# EAGLE board BSPD Test Board rev2 (EAGLE 7.7.0)
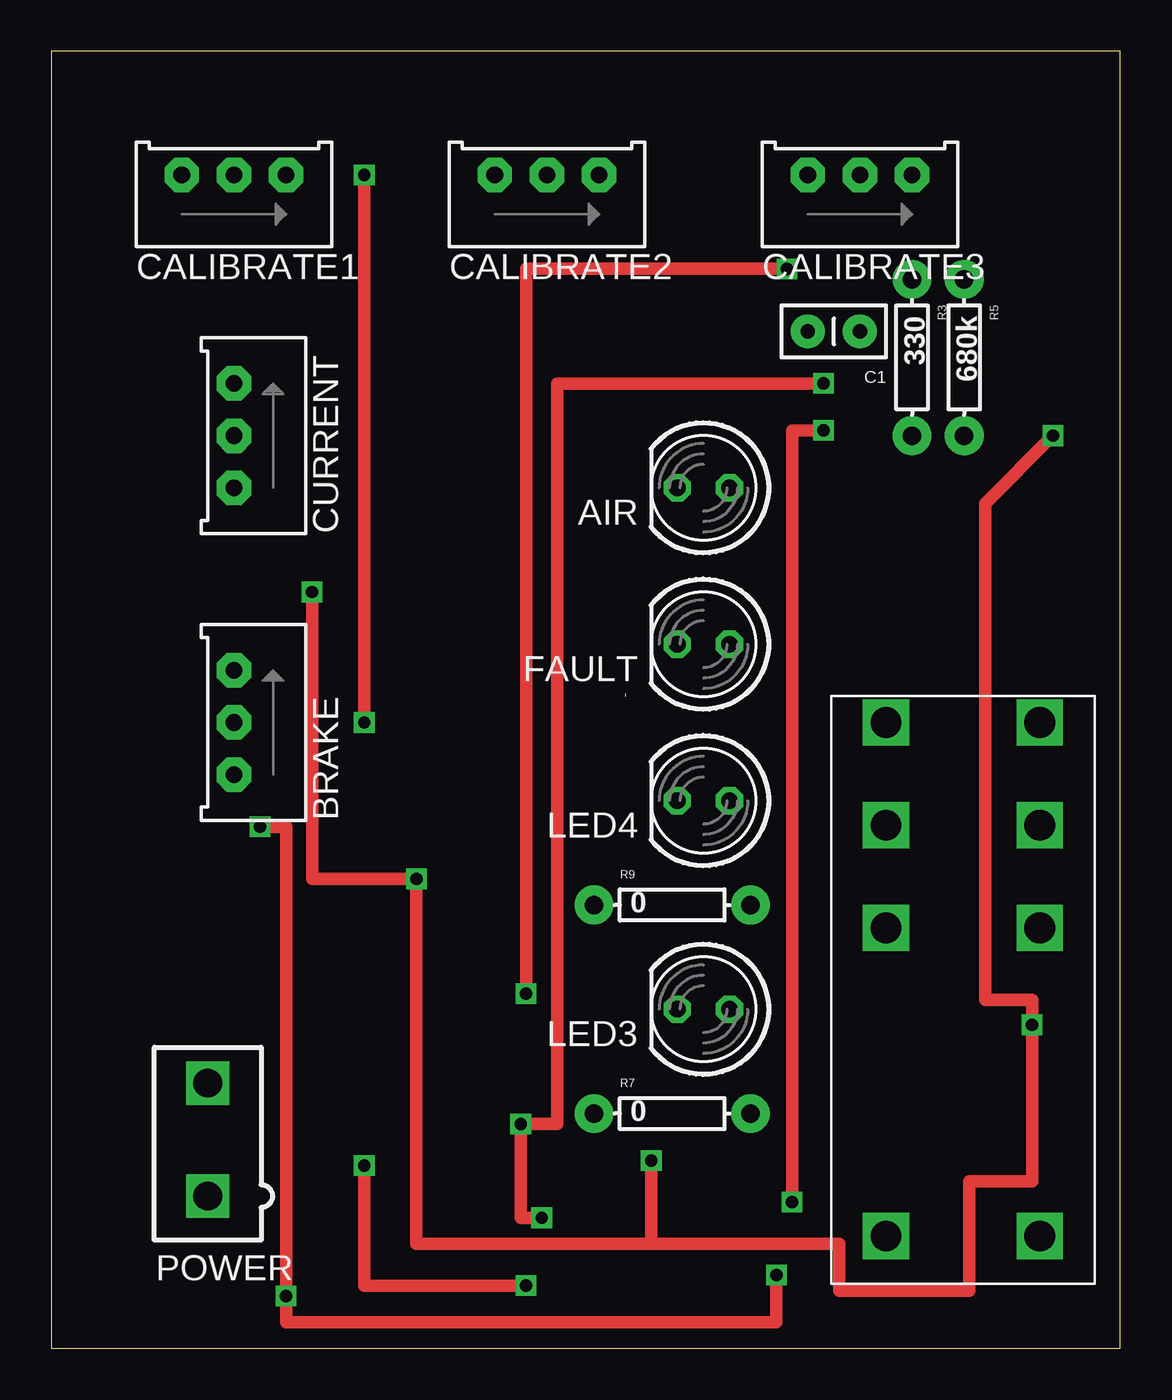
[diagram p0: board, top side]
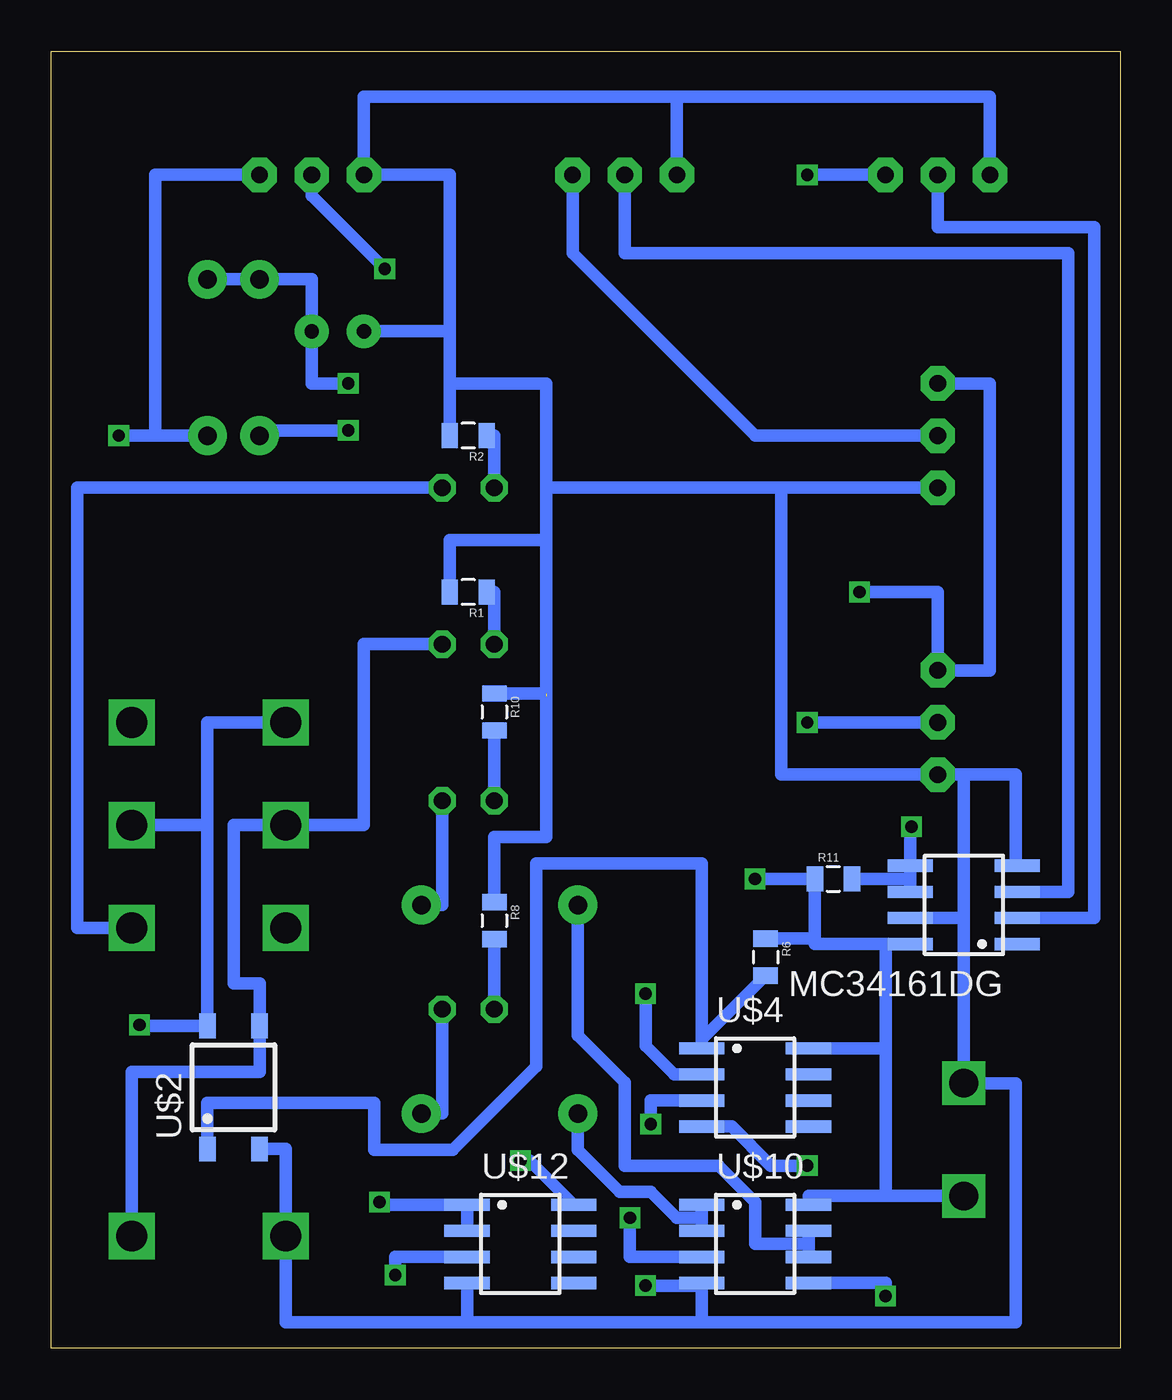
[diagram p1: board, bottom side, seen from below]

Size 52.05 x 63.17 mm. Coordinates in mm from the lower left corner, seen from the top.
Outline: 0,0 52.05,0 52.05,63.17 0,63.17 0,0
Copper layers (1*16): Top 0.035mm / dielectric 1.5mm / Bottom 0.035mm
Design rules "default": minimum track width 10mil, minimum drill 24mil, track to track 8mil, track to pad 8mil, pad to pad 8mil, via to via 8mil, smd to smd 8mil, copper to edge 40mil, drill to drill 8mil, minimum pad ring 10mil, minimum via ring 8mil, stop-mask expansion 4mil, vias tented up to drill 0mil, thermal gap 10mil

## Footprints (pad centres in the part's own frame; a part is rotated, then mirrored left to right if it is on the bottom)
LED-5MM = drill 0.813 octagon: A -1.27,0; K 1.27,0
TRIMPOT_3296 = drill 0.813 pad 1.676 octagon: 1 2.54,1.27; 2 0,1.27; 3 -2.54,1.27
CAP-PTH-SMALLEZ = drill 0.7 pad 1.651: 1 0,0; 2 2.54,0
SOIC-08 = smd 0.6 x 2.2: 1 -1.905,-2.6; 2 -0.635,-2.6; 3 0.635,-2.6; 4 1.905,-2.6; 5 1.905,2.6; 6 0.635,2.6; 7 -0.635,2.6; 8 -1.905,2.6
MINIFIT_5566-2 = drill 1.4 square: 1 0,-2.75; 2 0,2.75
0805 = smd 0.8 x 1.2: 1 -0.9,0; 2 0.9,0
AXIAL-0.3EZ = drill 0.9 pad 1.88: P$1 -3.81,0; P$2 3.81,0
SOP04 = smd 0.8 x 1.2: 1 -1.27,-3; 2 1.27,-3; 3 1.27,3; 4 -1.27,3
DPDT_RELAY_PANASONIC_JW2SN = drill 1.5 square: 2 10.008,0; 3 5.004,0; 4 0,0; 5 0,7.493; 6 5.004,7.493; 7 10.008,7.493; COIL+ 25.019,0; COIL- 25.019,7.493

## Placement (x,y rotation side)
AIR  [LED-5MM]  31.75,41.91 180 top
BRAKE  [TRIMPOT_3296]  10.16,30.48 90 top
C1  .47u  [CAP-PTH-SMALLEZ]  39.37,49.53 180 top
CALIBRATE1  [TRIMPOT_3296]  8.89,55.88 0 top
CALIBRATE2  [TRIMPOT_3296]  24.13,55.88 0 top
CALIBRATE3  [TRIMPOT_3296]  39.37,55.88 0 top
CURRENT  [TRIMPOT_3296]  10.16,44.45 90 top
FAULT  [LED-5MM]  31.75,34.29 180 top
LED3  [LED-5MM]  31.75,16.51 180 top
LED4  [LED-5MM]  31.75,26.67 180 top
MC34161DG  [SOIC-08]  7.62,21.59 90 bottom
POWER  MINIFIT_5566-2  [MINIFIT_5566-2]  7.62,10.16 0 top
R1  [0805]  31.75,36.83 180 bottom
R2  [0805]  31.75,44.45 180 bottom
R3  330  [AXIAL-0.3EZ]  41.91,48.26 270 top
R5  680k  [AXIAL-0.3EZ]  44.45,48.26 270 top
R6  680  [0805]  17.27,19.05 270 bottom
R7  0  [AXIAL-0.3EZ]  30.23,11.43 0 top
R8  [0805]  30.48,20.83 270 bottom
R9  0  [AXIAL-0.3EZ]  30.23,21.59 0 top
R10  [0805]  30.48,30.99 270 bottom
R11  10k  [0805]  13.97,22.86 0 bottom
U$2  CPC1002N  [SOP04]  43.18,12.7 0 bottom
U$3  DPDT_RELAY_PANASONIC_JW2SN-DC5V  [DPDT_RELAY_PANASONIC_JW2SN]  40.64,30.48 270 top
U$4  LM293DG4  [SOIC-08]  17.78,12.7 270 bottom
U$10  MCP6002  [SOIC-08]  17.78,5.08 270 bottom
U$12  MCP6002  [SOIC-08]  29.21,5.08 270 bottom

## Library data of the parts
AIR BRAKE C1 CALIBRATE1-CALIBRATE3 CURRENT FAULT LED3 LED4 MC34161DG R1-R3 R5-R11 U$2-U$4 U$10 U$12 = HyTechDevices
POWER = HyTechDevices; OC_FARNELL: 1822072; OC_NEWARK: unknown

## Nets
+5V: BRAKE.1 CALIBRATE3.1 CURRENT.1 MC34161DG.8 POWER.1 R5.P$2 R6.1 R11.1 U$2.4 U$3.4 U$3.6 U$4.8 U$10.8 U$12.8
GND: BRAKE.3 C1.2 CALIBRATE1.3 CALIBRATE2.3 CALIBRATE3.3 CURRENT.3 MC34161DG.4 MC34161DG.7 POWER.2 R1.2 R2.2 R8.1 R10.1 U$2.2 U$3.COIL+ U$4.4 U$10.4 U$12.4
N$1: FAULT.A U$2.3 U$3.3 U$3.COIL-
N$2: AIR.K R2.1
N$3: R3.P$2 U$12.1 U$12.2
N$4: MC34161DG.5 MC34161DG.6 R11.2 U$10.5 U$12.3
N$5: CALIBRATE2.2 MC34161DG.3
N$6: CALIBRATE1.2 MC34161DG.2
N$7: CALIBRATE3.2 U$4.2
N$8: FAULT.K R1.1
N$9: R6.2 U$2.1 U$4.1
N$10: LED3.A R7.P$2
N$11: LED3.K R8.2
N$12: LED4.A R9.P$2
N$13: C1.1 R3.P$1 R5.P$1 U$4.3 U$10.3
N$14: LED4.K R10.2
N$15: BRAKE.2 CALIBRATE1.1
READ_CHARGE: R7.P$1 U$10.1 U$10.2
READ_IMPED: R9.P$1 U$10.6 U$10.7
SENSE_A: CALIBRATE2.1 CURRENT.2
SHUTDOWN_OUT: AIR.A U$3.7

## Tracks (layer width: path | path; a pad name or v marks a point on that pad's centre or on a via)
+5V  (via drill 0.6)
  Top 0.61: v12.7,36.83 12.7,22.86 v17.78,22.86 17.78,5.08 29.21,5.08 | v48.77,44.45 45.47,41.15 45.47,16.97 47.75,16.97 v47.75,15.75 47.75,8.13 44.7,8.13 44.7,2.79 38.35,2.79 38.35,5.08 29.21,5.08 | v29.21,9.14 29.21,5.08
  Bottom 0.61: CURRENT.1 6.35,46.99 6.35,33.02 BRAKE.1 8.89,36.83 v12.7,36.83 | CALIBRATE3.1 46.99,57.15 46.99,44.45 R5.P$2 v48.77,44.45 | U$3.4 44.45,30.48 44.45,25.48 | U$3.6 44.45,25.48 | 44.45,25.48 U$2.4 47.75,15.7 v47.75,15.75 | POWER.1 11.43,7.41 | 11.43,7.41 15.18,7.41 U$10.8 | U$4.8 11.43,14.61 | 11.43,14.61 11.43,7.41 | MC34161DG.8 11.43,19.68 | 11.43,19.68 11.43,14.61 | 11.43,19.68 14.87,19.68 14.87,19.95 | 14.87,19.95 R11.1 v17.78,22.86 | R6.1 14.87,19.95 | v29.21,9.14 28.77,9.14 U$12.8
GND  (via drill 0.6)  (1 unrouted)
  Top 0.61: v15.24,8.89 15.24,3.05 v23.11,3.05
  Bottom 0.61: CALIBRATE1.3 6.35,60.96 21.59,60.96 | 21.59,60.96 CALIBRATE2.3 | 21.59,60.96 36.83,60.96 CALIBRATE3.3 32.65,57.15 32.65,49.53 | MC34161DG.4 5.08,23.5 5.08,27.94 7.62,27.94 | 7.62,27.94 BRAKE.3 16.51,27.94 16.51,41.91 | 16.51,41.91 CURRENT.3 | MC34161DG.7 7.62,20.95 | 7.62,20.95 7.62,27.94 | 7.62,20.95 POWER.2 5.08,12.91 5.08,1.27 20.38,1.27 | 27.94,39.37 27.94,31.89 R10.1 | 27.94,39.37 27.94,41.91 | 27.94,41.91 27.94,46.99 32.65,46.99 | 32.65,46.99 R2.2 | 27.94,39.37 32.65,39.37 R1.2 | 32.65,49.53 32.65,46.99 | 16.51,41.91 27.94,41.91 | C1.2 32.65,49.53 | U$2.2 40.64,9.7 U$3.COIL+ 40.64,1.27 31.81,1.27 | U$12.4 31.81,1.27 | 31.81,1.27 20.38,1.27 | 20.38,1.27 U$10.4 20.38,3.05 v23.11,3.05 | U$4.4 18.92,10.79 17.02,8.89 v15.24,8.89 | R8.1 30.48,24.89 27.94,24.89 27.94,31.75
N$1
  Bottom 0.61: FAULT.A 36.83,34.29 36.83,25.48 U$3.3 43.18,25.48 43.18,17.78 41.91,17.78 U$2.3 41.91,13.46 48.13,13.46 U$3.COIL-
N$2
  Bottom 0.61: R2.1 30.48,44.45 AIR.K
N$3  (via drill 0.6)
  Top 0.61: v36.07,7.11 36.07,44.7 v37.59,44.7
  Bottom 0.61: U$12.2 U$12.1 36.07,6.99 v36.07,7.11 | v37.59,44.7 41.91,44.7 R3.P$2
N$4  (via drill 0.6)
  Top 0.61: v10.16,25.4 11.43,25.4 v11.43,2.54 11.43,1.27 35.31,1.27 v35.31,3.56
  Bottom 0.61: 10.22,22.86 MC34161DG.5 10.22,25.4 v10.16,25.4 | 10.22,22.86 MC34161DG.6 | R11.2 10.22,22.86 | U$10.5 11.43,3.17 v11.43,2.54 | v35.31,3.56 35.31,4.45 U$12.3
N$5
  Bottom 0.61: MC34161DG.3 2.54,22.23 2.54,53.34 24.13,53.34 CALIBRATE2.2
N$6
  Bottom 0.61: MC34161DG.2 1.27,20.95 1.27,54.61 8.89,54.61 CALIBRATE1.2
N$7  (via drill 0.6)
  Top 0.61: v35.81,52.58 23.11,52.58 v23.11,17.27
  Bottom 0.61: CALIBRATE3.2 39.37,56.13 v35.81,52.58 | v23.11,17.27 23.11,14.73 21.72,13.34 U$4.2
N$8
  Bottom 0.61: R1.1 30.48,36.83 FAULT.K
N$9
  Bottom 0.61: U$2.1 44.45,11.94 36.32,11.94 36.32,9.65 32.51,9.65 28.45,13.72 28.45,23.62 20.38,23.62 U$4.1 20.38,15.04 R6.2
N$10
  Bottom 0.61: LED3.A 33.02,11.43 R7.P$2
N$11
  Bottom 0.61: R8.2 LED3.K
N$12
  Bottom 0.61: LED4.A 33.02,21.59 R9.P$2
N$13  (via drill 0.6)
  Top 0.61: v23.88,6.35 22.86,6.35 v22.86,10.92 24.64,10.92 24.64,46.99 v37.59,46.99
  Bottom 0.61: R5.P$1 R3.P$1 39.37,52.07 C1.1 39.37,46.99 v37.59,46.99 | U$10.3 23.88,4.45 v23.88,6.35 | v22.86,10.92 22.86,12.06 U$4.3
N$14
  Bottom 0.61: R10.2 LED4.K
N$15  (via drill 0.6)
  Top 0.61: v15.24,57.15 v15.24,30.48
  Bottom 0.61: CALIBRATE1.1 v15.24,57.15 | v15.24,30.48 BRAKE.2
READ_CHARGE
  Bottom 0.61: U$10.1 20.38,6.35 | 20.38,6.35 U$10.2 | 20.38,6.35 21.59,6.35 22.86,7.62 24.38,7.62 26.42,9.65 R7.P$1
READ_IMPED
  Bottom 0.61: U$10.6 15.18,5.08 | 15.18,5.08 U$10.7 | 15.18,5.08 17.78,5.08 17.78,7.11 19.56,8.89 24.13,8.89 24.13,12.95 26.42,15.24 R9.P$1
SENSE_A
  Bottom 0.61: CURRENT.2 17.78,44.45 26.67,53.34 CALIBRATE2.1
SHUTDOWN_OUT
  Bottom 0.61: U$3.7 50.8,20.47 50.8,41.91 AIR.A